# Altium PCB main.PcbDoc (part 2 of 2)
Units mm, origin at the board's own origin, x right, y up, seen from the top; angles counter-clockwise.
Board outline 98 x 96 mm, 4 copper layers (Top Layer, PWR Layer, GND Layer, Bottom Layer), stack 0.672 mm thick; 83 components, 70 nets, 395 pads, 159 vias.
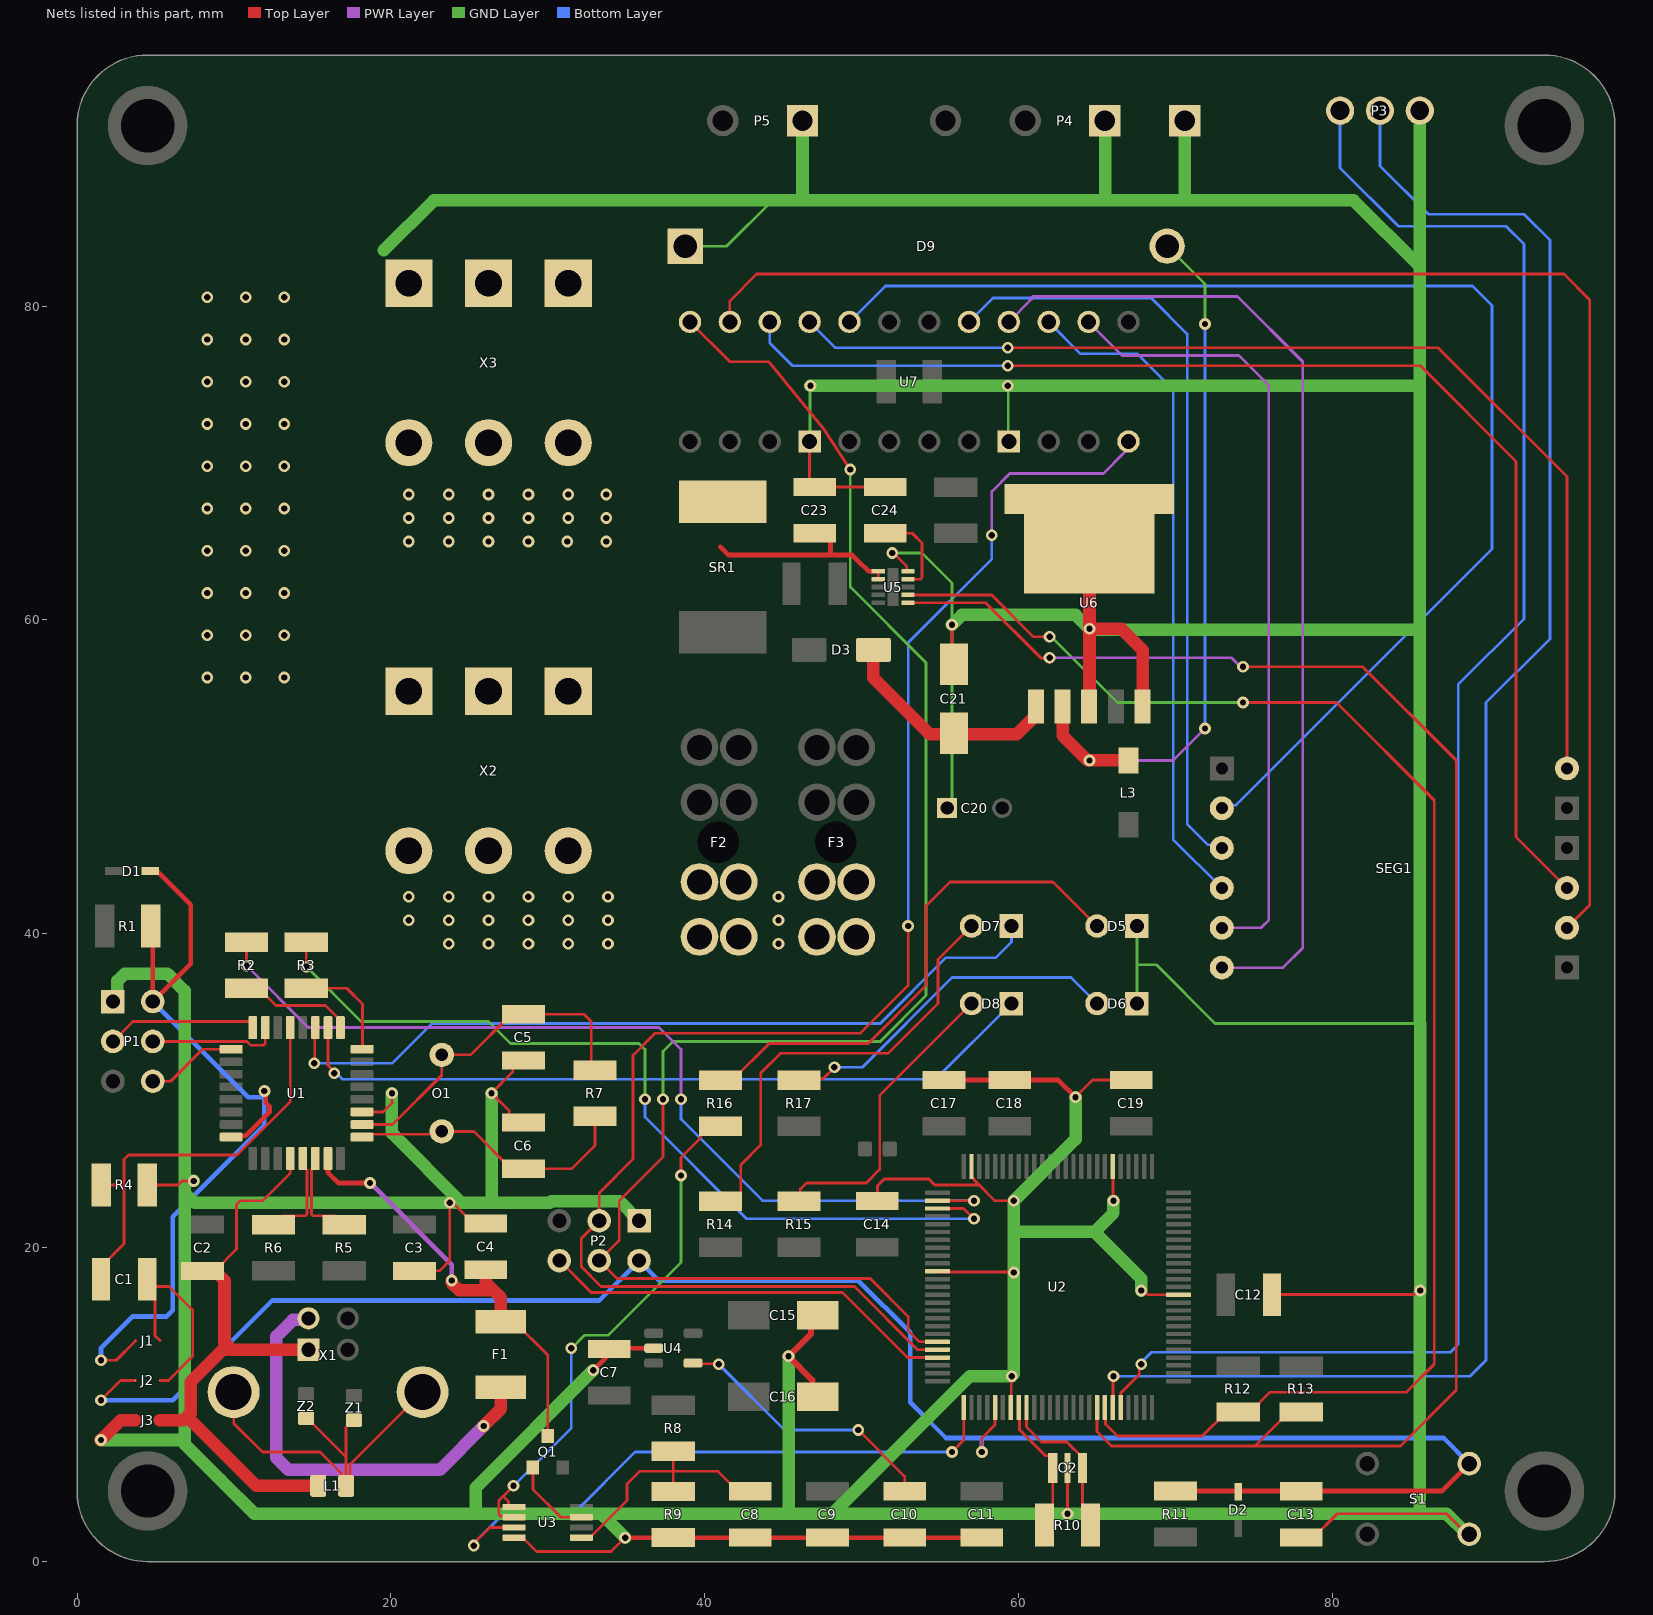
[diagram p4: the nets of this part, all layers, seen from the top]

## Via types
v1: diameter 0.75, hole 0.4, Top Layer to Bottom Layer, 159 vias

## Nets (pads, with @x,y where several pads share a name; then routed paths per layer and width w, separated by ;. In a path a pad name is that pad's centre, name@x,y a point inside that pad or via, vN(x,y) a via of type N, cw(c..) or ccw(c..) an arc to the next point about the centre after c; other vN are vias at no path point) (continued)
D_Seg_A: SEG1.11 U7.14 | length 98.1
  Top Layer w0.175: U7.14@41.6,78.994 41.6,80.335 43.307,82.042 94.742,82.042 96.393,80.391 96.393,41.832 SEG1.11@94.947,40.386
D_Seg_B: SEG1.7 U7.16 | length 70.9
  Top Layer w0.175: v1(59.309,77.343) 86.741,77.343 94.947,69.137 SEG1.7@94.947,50.546
  Bottom Layer w0.175: U7.16@46.68,78.994 48.331,77.343 v1(59.309,77.343)
D_Seg_C: SEG1.4 U7.20 | length 49.6
  Bottom Layer w0.175: U7.20@56.84,78.994 58.364,80.518 68.453,80.518 70.739,78.232 70.739,46.99 72.056,45.673 72.74,45.673 SEG1.4@72.947,45.466
D_Seg_D: SEG1.2 U7.23 | length 50.6
  PWR Layer w0.175: U7.23@64.46,78.994 66.599,76.855 74.046,76.855 75.946,74.954 75.946,40.894 75.438,40.386 SEG1.2@72.947,40.386
  Bottom Layer w0.175: SEG1.2@72.843,40.49 SEG1.2@72.947,40.386
D_Seg_DP: SEG1.3 U7.22 | length 42.8
  Bottom Layer w0.175: U7.22@61.92,78.994 63.952,76.962 67.564,76.962 69.85,74.676 69.85,46.023 SEG1.3@72.947,42.926
D_Seg_E: SEG1.1 U7.21 | length 64.2
  PWR Layer w0.175: U7.21@59.38,78.994 60.833,80.447 60.833,80.542 60.901,80.61 73.949,80.61 78.105,76.454 78.105,39.092 76.859,37.846 SEG1.1@72.947,37.846
D_Seg_F: SEG1.10 U7.15 | length 80.9
  Top Layer w0.175: U7.15@44.14,78.994 U7.15@44.365,78.769 ; v1(59.309,76.2) 85.598,76.2 91.694,70.104 91.694,46.179 SEG1.10@94.947,42.926
  Bottom Layer w0.175: U7.15@44.14,78.994 44.14,77.653 45.593,76.2 v1(59.309,76.2)
D_Seg_G: SEG1.5 U7.17 | length 82
  Bottom Layer w0.175: U7.17@49.22,78.994 51.506,81.28 88.924,81.28 90.17,80.034 90.17,64.516 73.853,48.199 73.14,48.199 SEG1.5@72.947,48.006
DX_N: R5.2 U1.30 | length 6.9
  Top Layer w0.102: U1.30@15.191,25.231 U1.30@15.191,25.681 ; R5.2@16.171,21.466 R5.2@17.02,21.466 R5.2@16.456,22.031
  Top Layer w0.175: U1.30@15.191,25.231 14.935,24.975 14.935,22.133 15.038,22.031 R5.2@16.456,22.031
DX_P: R6.2 U1.29 | length 7.7
  Top Layer w0.102: R6.2@13.084,22.031 R6.2@12.52,21.466 13.285,21.466 R6.2@13.849,22.031 ; U1.29@14.351,25.641 U1.29@14.391,25.681 ; U1.29@14.391,25.211 U1.29@14.391,25.641
  Top Layer w0.175: R6.2@13.084,22.031 13.849,22.031 14.556,22.031 14.659,22.133 14.659,24.874 14.659,24.944 U1.29@14.391,25.211
GND: C3.1 C4.2 C5.2 C6.2 C7.1 C8.1 C9.1 C10.1 C11.1 C12.1 C13.1 C14.1 C15.2 C16.2 C17.1 C18.1 C19.1 C20.2 C21.2 C23.1 C24.2 D5.2 D6.2 D9.2 J3.1 O2.2 P1.6 P2.6 P3.3 P4.3 P4.4 P5.2 R4.2 R9.1 S1.3 U1.3 U2.11 U2.32 U2.62 U2.81 U2.99 U3.4 U4.2 U5.10 U6.3 U6.5 U6.6 U7.4 U7.9 X2.2 X3.2 | length 698.6
  Top Layer w0.175: R4.2@4.466,24 6.445,24 6.702,24.257 v1(7.433,24.257) ; U1.3@18.161,28.651 19.507,28.651 20.066,29.21 v1(20.066,29.845) ; C3.1@21.5,18.525 23.097,18.525 23.749,19.177 v1(23.749,22.86) 23.859,22.75 24.046,22.75 25.255,21.541 C4.2@26.035,21.541 ; U3.4@27.85,1.525 28.385,1.525 29.275,0.635 34.036,0.635 v1(34.925,1.524) ; C6.2@28.448,27.975 28.038,27.975 27.546,28.468 27.546,28.715 v1(26.416,29.845) 27.757,31.186 27.757,31.433 28.249,31.926 C5.2@28.448,31.926 ; U7.9@46.68,71.374 46.68,68.796 C23.1@47,68.475 C24.2@51.5,68.475 ; C15.2@46.775,15.275 C15.2@47.2,15.7 ; C16.2@46.86,10.84 C16.2@47.2,10.5 ; C14.1@51,22.975 51,23.949 51.435,24.384 54.272,24.384 54.653,24.003 57.49,24.003 ; v1(51.943,64.262) 52.024,64.262 52.876,63.41 52.876,63.162 52.938,63.1 U5.10@52.95,63.1 ; U2.11@54.82,18.5 54.862,18.458 59.647,18.458 v1(59.69,18.415) ; v1(55.753,59.69) 55.753,57.318 C21.2@55.88,57.191 ; U2.99@57,25.18 57,24.52 57.171,24.349 57.171,24.322 57.49,24.003 ; C11.1@57.656,1.524 C11.1@57.658,1.525 ; U2.32@59.5,9.82 59.531,9.851 59.531,11.779 v1(59.563,11.811) ; v1(59.69,22.987) 58.506,22.987 57.49,24.003 ; v1(63.119,3.048) O2.2@63.119,5.969 ; v1(63.627,29.591) 64.721,30.685 C19.1@67.183,30.685 ; U6.3@64.5,54.5 U6.3@64.516,54.516 ; U6.6@64.5,65.175 U6.6@64.516,65.159 ; U2.81@66,25.18 66.02,25.16 66.02,23.261 v1@66.04,23.241 ; v1(67.818,17.272) 67.974,17.272 68.246,17 U2.62@70.18,17 ; C12.1@76.15,17 76.168,17.018 85.188,17.018 85.442,17.272 v1(85.598,17.272) ; C13.1@78,1.525 78.78,1.525 80.302,3.048 87.269,3.048 88.574,1.742 S1.3@88.721,1.742
  Top Layer w0.3: v1(32.893,12.192) 34.301,13.6 U4.2@36.745,13.6 ; v1(34.925,1.524) 47.819,1.524 C11.1@57.656,1.524 ; C17.1@55.245,30.685 C18.1@59.436,30.685 62.533,30.685 v1(63.627,29.591)
  Top Layer w0.4: C15.2@46.775,15.275 46.775,14.517 v1(45.339,13.081) 46.86,11.56 C16.2@46.86,10.84
  Top Layer w0.8: v1(1.524,7.747) 2.777,9 J3.1@3.72,9 ; U6.3@64.516,54.516 v1(64.516,59.436) ; U6.6@64.516,65.159 v1(64.516,59.436) ; U6.5@67.9,54.5 67.9,58.084 66.548,59.436 v1(64.516,59.436)
  GND Layer w0.175: D9.2@38.763,83.82 41.402,83.82 44.323,86.741 ; U7.9@46.68,71.374 46.708,71.402 46.708,74.902 v1(46.736,74.93) ; v1(51.943,64.262) 53.848,64.262 55.753,62.357 v1(55.753,59.69) C20.2@55.753,47.879 ; v1(59.309,74.93) 59.344,74.895 59.344,71.41 U7.4@59.38,71.374 ; v1@64.32,59.632 v1(64.516,59.436) ; D6.2@67.54,35.56 67.54,38.03 ; D5.2@67.54,40.5 67.54,38.03 ; 70.58,86.999 70.838,86.741 ; 85.566,34.29 72.517,34.29 68.777,38.03 67.54,38.03
  GND Layer w0.8: v1(1.524,7.747) 6.858,7.747 ; P1.6@2.286,35.687 2.574,35.975 2.574,36.996 3.042,37.465 5.754,37.465 6.858,36.361 6.858,24.257 ; v1(7.433,24.257) 6.858,24.257 ; 19.558,83.566 22.733,86.741 44.323,86.741 46.228,86.741 ; v1(20.066,29.845) 20.066,27.305 24.511,22.86 ; v1(26.416,29.845) 26.416,22.86 ; v1(32.893,12.192) 25.4,4.699 25.4,3.048 ; 33.591,2.857 v1(34.925,1.524) ; P2.6@35.814,21.717 34.562,22.969 30.216,22.969 30.107,22.86 26.416,22.86 ; v1(45.339,13.081) 45.339,3.048 ; P5.2@46.228,91.821 46.228,86.741 ; v1(46.736,74.93) v1(59.309,74.93) 85.471,74.93 85.566,74.835 ; v1(55.753,59.69) 56.388,60.325 63.627,60.325 v1@64.32,59.632 ; v1(63.627,29.591) 63.627,26.924 v1(59.69,22.987) 59.69,20.883 ; v1(64.516,59.436) 64.574,59.378 85.566,59.378 ; P4.3@65.532,91.789 65.532,86.741 ; v1(66.04,22.987) 66.04,22.225 64.825,21.01 ; v1(67.818,17.272) 67.818,18.017 64.825,21.01 ; 70.58,86.999 P4.4@70.58,91.821 ; P3.3@85.566,92.456 85.566,82.518 ; S1.3@88.721,1.742 88.574,1.742 87.269,3.048 85.566,3.048 ; 6.858,7.747 6.858,7.493 9.144,5.207 11.303,3.048 25.4,3.048 ; 6.858,7.747 6.858,23.495 ; 6.858,23.495 6.858,24.257 ; 6.858,23.495 7.493,22.86 v1(23.749,22.86) 24.511,22.86 ; 24.511,22.86 26.416,22.86 ; 25.4,3.048 45.339,3.048 ; 45.339,3.048 48.133,3.048 ; 46.228,86.741 65.532,86.741 ; 48.133,3.048 v1(63.119,3.048) 85.566,3.048 ; 48.133,3.048 56.896,11.811 v1(59.563,11.811) 59.69,11.938 v1(59.69,18.415) 59.69,20.883 ; 59.69,20.883 59.817,21.01 64.825,21.01 ; 65.532,86.741 70.838,86.741 81.343,86.741 85.566,82.518 ; 85.566,3.048 85.566,17.113 85.598,17.145 v1(85.598,17.272) 85.598,34.258 85.566,34.29 85.566,59.378 ; 85.566,59.378 85.566,74.835 ; 85.566,74.835 85.566,82.518
  other v1: 8.3,56.34 10.75,56.34 13.2,56.34 8.3,59.032 10.75,59.032 13.2,59.032 8.3,61.724 10.75,61.724 13.2,61.724 8.3,64.416 10.75,64.416 13.2,64.416 8.3,67.107 10.75,67.107 13.2,67.107 8.3,69.799 10.75,69.799 13.2,69.799 8.3,72.49 10.75,72.49 13.2,72.49 8.3,75.182 10.75,75.182 13.2,75.182 8.3,77.874 10.75,77.874 13.2,77.874 8.3,80.566 10.75,80.566 13.2,80.566
LM2576_OUTPUT: D9.1 L3.1 U6.2 | length 46.8
  Top Layer w0.8: U6.2@62.8,54.5 62.8,52.643 64.393,51.05 L3.1@67,51.05
  PWR Layer w0.175: v1@64.393,51.05 69.846,51.05 v1(71.882,53.086)
  GND Layer w0.175: D9.1@69.463,83.82 71.882,81.401 v1(71.882,78.867)
  Bottom Layer w0.175: v1(71.882,53.086) v1(71.882,78.867)
  other v1: 64.516,51.05
LM2576_VIN: C21.1 D3.C U6.1 | length 14.9
  Top Layer w0.175: U6.1@61.1,53.93 61.1,54.271 U6.1@61.1,54.5
  Top Layer w0.8: D3.C@50.75,58.1 50.75,56.311 54.356,52.705 56.059,52.705 59.875,52.705 U6.1@61.1,53.93 ; U6.1@60.99,54.381 U6.1@61.1,54.271
Load+: C23.2 SR1.2 U5.1 U5.2 X3.1 | length 15.1
  Top Layer w0.175: SR1.2@41.148,67.523 SR1.2@42.41,66.26 ; U5.2@51.05,62.6 U5.1@51.05,63.1
  Top Layer w0.3: 40.996,64.668 41.529,64.135 48.006,64.135 ; C23.2@47,65.525 47.576,65.525 48.006,65.095 48.006,64.135 ; U5.1@51.05,63.1 50.438,63.1 49.784,63.754 49.403,64.135 48.006,64.135
  other v1: 21.14,65 23.68,65 26.22,65 28.76,65 31.242,65 33.724,65 21.14,66.5 23.68,66.5 26.22,66.5 28.76,66.5 31.3,66.5 33.724,66.5 21.14,68 23.68,68 26.22,68 28.76,68 31.3,68 33.724,68
MISO1: P2.1 U2.22 | length 26.6
  Top Layer w0.175: P2.1@30.734,19.177 32.766,17.145 48.768,17.145 52.913,13 U2.22@54.82,13
MOSI1: P2.4 U2.21 U7.1 | length 103.1
  Top Layer w0.175: v1(52.959,40.5) 52.959,36.703 49.928,33.672 36.847,33.672 35.433,32.258 35.433,25.654 33.274,23.495 P2.4@33.274,21.717 32.131,20.574 32.131,18.796 33.401,17.526 49.53,17.526 53.556,13.5 U2.21@54.82,13.5
  PWR Layer w0.175: v1(58.293,65.405) 58.293,68.199 59.436,69.342 65.405,69.342 66.761,70.698 66.761,71.135 U7.1@67,71.374
  Bottom Layer w0.175: v1(52.959,40.5) 52.959,58.547 58.293,63.881 v1(58.293,65.405)
NetC1_2: C1.2 J1.1 J2.1 | length 13.6
  Top Layer w0.175: J2.1@5.28,11.54 5.825,11.54 7.366,13.081 7.366,16.026 5.866,17.526 4.95,17.526 C1.2@4.475,18 4.475,17.22 4.968,16.728 4.968,14.392 J1.1@5.28,14.08
NetC10_2: C10.2 U4.4 | length 17.4
  Top Layer w0.175: U4.4@39.255,12.65 39.293,12.612 40.855,12.612 v1(40.894,12.573) ; v1(49.784,8.382) 52.738,5.428 C10.2@52.738,4.475
  Bottom Layer w0.175: v1(40.894,12.573) 45.085,8.382 v1(49.784,8.382)
NetD5_1: D5.1 R16.1 | length 33.4
  Top Layer w0.175: R16.1@41,30.676 41.765,30.676 44.109,33.02 50.419,33.02 54.102,36.703 54.102,41.783 55.626,43.307 62.193,43.307 D5.1@65,40.5
NetD6_1: D6.1 R17.1 | length 22.4
  Top Layer w0.175: R17.1@46.01,30.676 46.121,30.786 47.55,30.786 v1(48.26,31.496)
  Bottom Layer w0.175: v1(48.26,31.496) 50.038,31.496 55.753,37.211 63.349,37.211 D6.1@65,35.56
NetD7_1: D7.1 R14.1 | length 28.6
  Top Layer w0.175: R14.1@41,22.966 41.765,22.966 42.292,23.493 42.292,25.274 43.561,26.543 43.561,31.115 44.831,32.385 51.689,32.385 54.864,35.56 54.864,38.364 D7.1@57,40.5
NetD8_1: D8.1 R15.1 | length 19.4
  Top Layer w0.175: R15.1@46.01,22.966 46.093,23.048 46.093,23.741 46.482,24.13 50.292,24.13 51.146,24.984 51.146,29.706 D8.1@57,35.56
NetF1_1: F1.1 X1.1 | length 28.1
  Top Layer w0.8: v1(25.908,8.636) 27,9.728 F1.1@27,11.097
  PWR Layer w0.8: X1.1@14.982,15.621 14.765,15.404 13.753,15.404 12.7,14.351 12.7,6.604 13.462,5.842 23.114,5.842 v1(25.908,8.636)
NetF2_2: F2.2 F3.2 X2.1
  other v1: 23.68,39.37 26.22,39.37 28.76,39.37 31.3,39.37 33.84,39.37 44.7,39.37 21.14,40.87 23.68,40.87 26.22,40.87 28.76,40.87 31.3,40.87 33.84,40.87 44.7,40.87 21.14,42.37 23.68,42.37 26.22,42.37 28.76,42.37 31.3,42.37 33.84,42.37 44.7,42.37
NetL1_1: L1.1 X1.S1 X1.S2 Z1.1 Z2.1 | length 26.5
  Top Layer w0.175: X1.S2@9.98,10.3 9.98,8.816 11.811,6.985 15.494,6.985 16.822,5.657 16.822,5.434 16.922,5.334 L1.1@17.145,5.334 ; Z2.1@14.605,9.126 14.68,9.126 17.145,6.661 ; Z1.1@17.653,9.017 17.59,9.017 17.145,8.572 17.145,6.661 ; X1.S1@22.02,10.8 17.404,6.184 17.404,5.434 17.387,5.416 17.151,5.416 17.395,5.076 L1.1@17.145,4.826 L1.1@17.145,5.334 ; L1.1@17.145,5.334 17.145,5.425 17.145,6.661
"Op A (+) Input": U2.26 U3.3 | length 39.3
  Top Layer w0.175: v1(25.273,1.016) 25.273,1.143 26.305,2.175 U3.3@27.85,2.175 ; v1(55.753,6.985) 56.5,7.732 U2.26@56.5,9.82
  Bottom Layer w0.175: v1(25.273,1.016) 25.273,1.143 27.241,3.111 31.686,3.111 35.56,6.985 v1(55.753,6.985)
"Op A Output": R16.2 U3.1 U3.2 | length 34.1
  Top Layer w0.175: 26.879,3.875 26.879,2.986 26.982,2.884 27.791,2.884 U3.2@27.85,2.825 ; 26.879,3.892 27.156,4.169 27.49,3.835 27.49,3.587 27.603,3.475 U3.1@27.85,3.475 ; 27.168,4.181 v1(27.813,4.826) ; v1(38.481,24.602) 38.481,25.749 39.73,26.998 39.73,27.216 40.257,27.744 R16.2@41,27.744
  GND Layer w0.175: v1(31.496,13.589) 32.322,14.414 33.846,14.414 38.481,19.05 v1(38.481,24.602)
  Bottom Layer w0.175: v1(27.813,4.826) 31.496,8.509 v1(31.496,13.589)
"Op B (+) Input": C8.2 R8.1 R9.2 U3.5 | length 16.2
  Top Layer w0.175: U3.5@32.15,1.525 32.685,1.525 35.052,3.892 35.052,4.953 35.849,5.75 38,5.75 ; R9.2@38,4.466 38,5.75 ; R8.1@38,7.034 38,5.75 ; C8.2@42.899,4.475 42.119,4.475 40.845,5.75 38,5.75
"Op B Output": Q1.1 U3.7 | length 5.2
  Top Layer w0.175: Q1.1@29.05,6 29.05,4.605 30.83,2.825 U3.7@32.15,2.825
PB1_16U2: P1.3 U1.15 | length 8.3
  Top Layer w0.175: P1.3@4.826,33.147 10.828,33.147 11.066,32.908 11.888,32.908 11.991,33.011 U1.15@11.991,34.021
PB2_16U2: P1.4 U1.16 | length 9.7
  Top Layer w0.175: P1.4@2.286,33.147 3.556,34.417 11.004,34.417 11.191,34.229 U1.16@11.191,34.021
PB3_16U2: P1.1 U1.17 | length 5.8
  Top Layer w0.175: P1.1@4.826,30.607 5.969,30.607 8.013,32.651 U1.17@9.821,32.651
PD2_16U2: R3.2 U1.8 | length 6.9
  Top Layer w0.102: U1.8@18.161,32.651 U1.8@18.192,32.682
  Top Layer w0.175: R3.2@14.6,36.534 17.187,36.534 18.192,35.529 U1.8@18.192,32.682
PD3_16U2: R2.2 U1.9 | length 7.3
  Top Layer w0.102: R2.2@10.8,36.534 R2.2@11.565,36.534 ; U1.9@16.791,34.021 U1.9@16.791,34.481
  Top Layer w0.175: R2.2@11.565,36.534 12.666,35.433 15.839,35.433 U1.9@16.791,34.481
PD4_16U2: D8.2 U1.10 | length 48.4
  Top Layer w0.175: U1.10@15.991,34.021 15.991,31.625 16.383,31.233 v1(16.383,31.115)
  Bottom Layer w0.175: v1(16.383,31.115) 16.523,31.115 16.904,30.734 54.714,30.734 D8.2@59.54,35.56
PD5_16U2: D7.2 U1.11 | length 51
  Top Layer w0.175: v1(15.113,31.75) 15.152,31.789 15.152,33.982 U1.11@15.191,34.021
  Bottom Layer w0.175: v1(15.113,31.75) 20.066,31.75 22.606,34.29 51.181,34.29 55.372,38.481 58.547,38.481 59.54,39.474 D7.2@59.54,40.5
PD7_16U2: C1.1 R4.1 U1.13 | length 26.6
  Top Layer w0.175: C1.1@1.525,18 1.525,18.78 3,20.255 3,24.257 ; R4.1@1.534,24 2.743,24 3,24.257 ; U1.13@13.591,34.021 13.591,29.318 10.181,25.908 3.277,25.908 3,25.631 3,24.257
Reset: C13.2 D2.A J2.2 P2.5 R11.1 S1.1 U2.30 | length 125.1
  Top Layer w0.175: v1(1.524,10.287) 2.777,11.54 J2.2@3.72,11.54 ; v1(57.658,6.985) 57.658,7.874 58.5,8.716 U2.30@58.5,9.82
  Top Layer w0.3: R11.1@70,4.492 86.971,4.492 S1.1@88.721,6.242
  Bottom Layer w0.3: v1(1.524,10.287) 6.096,10.287 12.446,16.637 33.274,16.637 P2.5@35.814,19.177 37.084,17.907 49.784,17.907 53.086,14.605 53.086,10.16 55.372,7.874 57.658,7.874 ; v1(57.658,6.985) 57.658,7.874 ; S1.1@88.721,6.242 87.089,7.874 57.658,7.874
Reset2: D1.A J1.2 P1.5 R1.1 U1.24 | length 54.7
  Top Layer w0.175: v1(1.524,12.827) 2.497,12.827 3.72,14.05 J1.2@3.72,14.08 ; R1.1@4.699,40.5 R1.1@4.826,40.373
  Top Layer w0.3: R1.1@4.826,40.373 P1.5@4.826,35.687 7.239,38.1 7.239,41.861 D1.A@5.1,44 ; U1.24@9.821,27.051 9.901,27.131 10.748,27.131 12.262,28.645 12.262,29.01 12.024,29.248 12.024,29.899 v1(11.938,29.985)
  Bottom Layer w0.3: v1(1.524,12.827) 1.524,13.589 3.556,15.621 5.715,15.621 6.096,16.002 6.096,21.971 11.938,27.813 11.938,29.591 ; P1.5@4.826,35.687 10.922,29.591 11.938,29.591 ; v1(11.938,29.985) 11.938,29.591
RXD0: R2.1 U2.2 | length 59
  Top Layer w0.175: v1(10.8,37.973) R2.1@10.8,39.466 ; U2.2@54.82,23 54.826,22.993 57.144,22.993 v1(57.15,22.987)
  PWR Layer w0.175: v1@10.795,37.973 14.732,34.036 37.084,34.036 38.481,32.639 v1(38.481,29.464)
  Bottom Layer w0.175: v1(38.481,29.464) 38.481,28.194 43.675,23 53.902,23 53.915,22.987 v1(57.15,22.987)
RXD1: P3.2 U2.45 | length 115.5
  Top Layer w0.175: U2.45@66,9.82 66.02,9.84 66.02,11.791 v1(66.04,11.811)
  Bottom Layer w0.175: v1(66.04,11.811) 88.773,11.811 89.789,12.827 89.789,54.737 93.853,58.801 93.853,84.201 92.202,85.852 86.106,85.852 83.026,88.932 P3.2@83.026,92.456
SCK1: P2.3 U2.20 U7.13 | length 107.7
  Top Layer w0.175: v1@37.338,29.337 37.338,25.781 34.544,22.987 34.544,20.447 P2.3@33.274,19.177 34.417,18.034 50.546,18.034 52.959,15.621 52.959,14.732 53.691,14 U2.20@54.82,14 ; U7.13@39.06,78.994 41.6,76.454 44.069,76.454 44.172,76.351 47.582,72.165 v1(49.276,69.596)
  GND Layer w0.175: v1@37.338,29.337 37.338,32.512 37.973,33.147 51.181,33.147 54.102,36.068 54.102,57.277 49.276,62.103 v1(49.276,69.596)
  other v1: 37.338,29.464
SCL: R13.1 U2.43 U5.6 | length 109.4
  Top Layer w0.175: U5.6@52.95,61.1 57.899,61.1 61.44,57.559 v1@61.914,57.559 ; v1@61.866,57.387 v1@61.976,57.277 ; U2.43@65,9.82 65,8.279 65.913,7.366 75.067,7.366 ; v1(74.295,57.023) 81.921,57.023 87.884,51.06 87.884,10.922 84.328,7.366 75.067,7.366 ; R13.1@78,9.534 77.235,9.534 75.067,7.366
  PWR Layer w0.175: v1(61.976,57.594) 73.568,57.594 74.139,57.023 v1(74.295,57.023)
SDA: R12.1 U2.44 U5.7 | length 99.1
  Top Layer w0.175: U5.7@52.95,61.6 58.288,61.6 60.96,58.928 v1(61.976,58.928) ; U2.44@65.5,9.82 65.538,9.782 65.538,8.757 66.294,8.001 71.702,8.001 73.235,9.534 R12.1@74,9.534 74.765,9.534 76.026,10.795 84.709,10.795 86.487,12.573 86.487,48.514 80.264,54.737 v1(74.295,54.737)
  GND Layer w0.175: v1@62.039,58.991 66.294,54.737 v1(74.295,54.737)
TXD0: R3.1 U2.3 | length 55.9
  Top Layer w0.175: v1(14.6,37.91) R3.1@14.6,39.466 ; U2.3@54.82,22.5 56.494,22.5 v1(57.15,21.844)
  GND Layer w0.175: v1@14.605,37.91 18.098,34.417 26.226,34.417 27.622,33.02 35.814,33.02 36.195,32.639 v1(36.195,29.464)
  Bottom Layer w0.175: v1(36.195,29.464) 36.195,28.321 42.672,21.844 v1(57.15,21.844)
TXD1: P3.1 U2.46 | length 113.2
  Top Layer w0.175: U2.46@66.5,9.82 66.507,9.827 66.507,10.754 67.691,11.938 67.691,12.183 67.708,12.2 67.708,12.556 v1@67.691,12.573
  Bottom Layer w0.175: v1@67.754,12.636 68.453,13.335 87.503,13.335 88.011,13.843 88.011,55.88 92.202,60.071 92.202,83.947 91.059,85.09 84.201,85.09 80.486,88.805 P3.1@80.486,92.456
  other v1: 67.818,12.573
USBGND: C2.1 J3.2 L1.2 U1.28 X1.4 | length 38.9
  Top Layer w0.175: C2.1@8.78,18.525 10.16,19.906 10.16,22.757 10.39,22.987 11.811,22.987 13.591,24.767 U1.28@13.591,25.681
  Top Layer w0.8: J3.2@5.28,9 6.77,9 7.239,9.469 7.239,11.43 9.309,13.5 9.866,13.5 ; 7.013,9.243 11.43,4.826 L1.2@15.367,4.826 ; C2.1@8,18.525 8.78,18.525 9.397,17.908 9.397,13.969 9.587,13.778 9.866,13.5 ; X1.4@14.75,13.5 9.866,13.5
USBVCC: C4.1 F1.2 Q1.3 U1.31 | length 27.9
  Top Layer w0.175: F1.2@27,15.297 27.85,15.297 30,13.147 Q1.3@30,8
  Top Layer w0.3: U1.31@15.991,25.681 15.991,24.776 16.637,24.13 v1(18.669,24.13)
  Top Layer w0.8: v1(23.876,17.907) 23.876,17.766 24.345,17.298 26.517,17.298 ; C4.1@26.035,18.591 26.035,17.78 26.517,17.298 ; F1.2@27,15.297 27,16.815 26.517,17.298
  PWR Layer w0.3: v1(18.669,24.13) 23.876,18.923 v1(23.876,17.907)
VREG: C24.1 U5.9 | length 5.7
  Top Layer w0.175: C24.1@51.5,65.525 53.22,65.525 53.848,64.897 53.848,62.702 53.745,62.6 U5.9@52.95,62.6
XTAL1: O2.3 R10.2 U2.34 | length 10.1
  Top Layer w0.175: U2.34@60.5,9.82 60.5,8.588 61.468,7.62 63.068,7.62 64.069,6.619 O2.3@64.069,5.969 64.069,2.841 R10.2@64.585,2.325
XTAL1_16U2: C6.1 O1.1 R7.1 U1.1 | length 18.5
  Top Layer w0.175: U1.1@18.161,27.051 18.341,27.231 23.061,27.231 O1.1@23.241,27.411 25.282,27.411 27.668,25.025 C6.1@28.448,25.025 31.502,25.025 33,26.523 R7.1@33,28.385
XTAL2: O2.1 R10.1 U2.33 | length 8.8
  Top Layer w0.175: U2.33@60,9.82 60.052,9.768 60.052,8.401 61.709,6.744 61.957,6.744 62.169,6.531 62.169,2.841 R10.1@61.653,2.325
XTAL2_16U2: C5.1 O1.2 R7.2 U1.2 | length 21.7
  Top Layer w0.175: U1.2@18.161,27.851 20.104,27.851 23.241,30.988 O1.2@23.241,32.291 25.084,32.291 27.668,34.876 C5.1@28.448,34.876 32.307,34.876 32.766,34.417 32.766,31.551 R7.2@33,31.317
pads on no net: F2. F3. S1.2 S1.4 U1.5 U1.6 U1.7 U1.12 U1.14 U1.18 U1.19 U1.20 U1.21 U1.22 U1.23 U1.25 U1.26 U2.1 U2.4 U2.5 U2.6 U2.8 U2.9 U2.12 U2.13 U2.14 U2.15 U2.16 U2.17 U2.18 U2.19 U2.23 U2.24 U2.25 U2.27 U2.28 U2.29 U2.35 U2.36 U2.37 U2.38 U2.39 U2.40 U2.41 U2.42 U2.47 U2.48 U2.49 U2.50 U2.51 U2.52 U2.53 U2.54 U2.55 U2.56 U2.57 U2.58 U2.59 U2.60 U2.63 U2.64 U2.65 U2.66 U2.67 U2.68 U2.69 U2.70 U2.71 U2.72 U2.73 U2.74 U2.75 U2.76 U2.77 U2.79 U2.82 U2.83 U2.84 U2.85 U2.86 U2.87 U2.88 U2.89 U2.90 U2.91 U2.92 U2.93 U2.94 U2.95 U2.96 U2.97 U5.11 U7.3 U7.5 U7.8 U7.10 U7.24

## Polygon pours and split planes (outlines as drawn)
GND on Bottom Layer "NONET_L01_P-001" (hatched 45Degree grid 0.508 track 0.203, pour order 1): 4.5,96 93.5,96 cw(c93.5,91.5) 98,91.5 98,4.5 cw(c93.5,4.5) 93.5,0 4.5,0 cw(c4.5,4.5) 0,4.5 0,91.5 cw(c4.5,91.5)
GND on Top Layer "NONET_L01_P-001" (hatched 45Degree grid 0.508 track 0.203, pour order 0): 4.5,96 93.5,96 cw(c93.5,91.5) 98,91.5 98,4.5 cw(c93.5,4.5) 93.5,0 4.5,0 cw(c4.5,4.5) 0,4.5 0,91.5 cw(c4.5,91.5)

## Keep-outs
Keep-Out Layer:
  the board outline again, w0.254

## Other copper
Top Layer:
  region net Battery+: 37.648,60 37.648,47.498 51.562,47.498 51.562,53.34 44.648,53.34 44.648,60
  region net NetF2_2: 18.14,48.3 34.3,48.3 34.3,44.45 34.554,44.196 51.562,44.196 51.562,36.807 23.633,36.807 18.14,42.3
  pour cut-out: 53.356,8.398 53.356,26.654 71.739,26.654 71.739,8.398
  pour cut-out: 8.398,35.417 19.542,35.417 19.542,24.273 8.398,24.273
  region net GND: 7.752,84.46 32.38,84.46 34.3,82.54 34.3,77.988 32.812,76.5 17.318,76.5 16,75.182 16,61.724 17.224,60.5 33,60.5 34.3,59.2 34.3,53.858 32.902,52.46 7.484,52.46 5.5,54.444 5.5,82.208
  region net Load+: 18.14,74.3 35.941,74.3 35.941,69.523 44.069,69.523 44.069,62.865 21.463,62.865 18.14,66.188
PWR Layer:
  region net Battery+: 37.648,60 44.648,60 44.648,53.34 51.562,53.34 51.562,47.498 37.648,47.498
  region net GND: 34.3,82.54 34.3,77.988 32.812,76.5 17.318,76.5 16,75.182 16,61.724 17.224,60.5 33,60.5 34.3,59.2 34.3,53.858 32.902,52.46 7.484,52.46 5.5,54.444 5.5,82.208 7.752,84.46 32.38,84.46
  region net NetF2_2: 18.14,48.3 34.3,48.3 34.3,44.45 34.554,44.196 51.562,44.196 51.562,36.807 23.633,36.807 18.14,42.3
  region net Load+: 18.14,74.3 35.941,74.3 35.941,69.523 44.069,69.523 44.069,62.865 21.463,62.865 18.14,66.188
GND Layer:
  region net Battery+: 37.648,60 44.648,60 44.648,53.34 51.562,53.34 51.562,47.498 37.648,47.498
  region net GND: 7.752,84.46 32.38,84.46 34.3,82.54 34.3,77.988 32.812,76.5 17.318,76.5 16,75.182 16,61.724 17.224,60.5 33,60.5 34.3,59.2 34.3,53.858 32.902,52.46 7.484,52.46 5.5,54.444 5.5,82.208
  region net NetF2_2: 18.14,48.3 34.3,48.3 34.3,44.45 34.554,44.196 51.562,44.196 51.562,36.807 23.633,36.807 18.14,42.3
  region net Load+: 18.14,74.3 35.941,74.3 35.941,69.523 44.069,69.523 44.069,62.865 21.463,62.865 18.14,66.188
Bottom Layer:
  region net Battery+: 37.648,60 44.648,60 44.648,53.34 51.562,53.34 51.562,47.498 37.648,47.498
  region net GND: 32.38,84.46 34.3,82.54 34.3,77.988 32.812,76.5 17.318,76.5 16,75.182 16,61.724 17.224,60.5 33,60.5 34.3,59.2 34.3,53.858 32.902,52.46 7.484,52.46 5.5,54.444 5.5,82.208 7.752,84.46
  region net NetF2_2: 18.14,48.3 34.3,48.3 34.3,44.45 34.554,44.196 51.562,44.196 51.562,36.807 23.633,36.807 18.14,42.3
  region net Load+: 18.14,74.3 35.941,74.3 35.941,69.523 44.069,69.523 44.069,62.865 21.463,62.865 18.14,66.188
Multi-Layer:
  pour cut-out: 4.5,54.444 4.5,82.208 7.752,85.46 32.38,85.46 35.3,82.54 35.3,77.988 37.3,77.988 37.3,69.85 45,69.85 45,54 51.816,54 51.816,35.807 23.633,35.807 17.14,42.3 17.14,51.46 7.484,51.46
  pour cut-out: 1.016,36.957 1.016,29.337 6.096,29.337 6.096,36.957
  pour cut-out: 77.978,94.869 88.011,94.869 88.011,88.9 77.978,88.9
  pour cut-out: 37.084,22.987 37.084,17.907 29.464,17.907 29.464,22.987

## Silkscreen, mask and mechanical layers (free items; w line width, h text height)
Top Overlay:
  lines w0.254: 30.353,60.198 37.948,60.198 ; 44.348,60.198 46.863,60.198 ; 46.863,60.198 47,60.335 ; 46.863,60.198 47,60.335 ; 47,60.335 47,60.95 47,60.335
  text "TX" at 79.986,90.75 h1 r270
  text "RX" at 82.526,90.75 h1 r270
  text "GND" at 85.092,90.75 h1 r270
  text "UART" at 88.395,90.7 h1.2 r270
  text "+3V3" at 40.648,89.75 h1 r270
  text "GND" at 45.728,89.75 h1 r270
  text "+5V" at 54.84,89.75 h1 r270
  text "+5V" at 59.92,89.75 h1 r270
  text "GND" at 65,89.75 h1 r270
  text "GND" at 70.08,89.75 h1 r270
  text "-" at 16.334,80.46 h2
  text "LOAD" at 5.5,75.38 h2
  text "+" at 16.334,70.3 h2
  text "-" at 16.334,54.46 h2
  text "BATTERY" at 5.5,49.38 h2
  text "+" at 16.334,44.3 h2
  text "PNAR" at 59.608,16.522 h1.5
Bottom Overlay:
  drawing of 20 lines, arcs and shapes, not listed
  text "GND" at 49.184,92.073 h1.2 r270
  text "+5V" at 50.6,87.501 h1.2 r270
  text "GND" at 74.33,87.501 h1.2 r270
  text "+3V3" at 36.4,86.901 h1.2 r270
  text "TX" at 80.012,86.604 h1 r270
  text "RX" at 82.552,86.604 h1 r270
  text "+5V" at 62.25,85.8 h1
  text "GND" at 66.416,85.8 h1
  text "GND" at 85.066,85.584 h1 r270
  text "UART" at 88.421,83.821 h1.2 r270
  text "76A" at 54.441,58.749 h2.5 r270
  text "Max / Board / Rating" at 46.681,57.602 h1.5 r270
  text "Current" at 65.5,48.503 h3 r270
  text "RX" at 54.137,39.5 h1.2 r270
  text "On" at 62.138,39.5 h1.2 r270
  text "/" at 13.181,35.287 h1.2
  text "S" at 62.138,35.16 h1.2 r270
  text "GND" at 11.481,35.087 h1.2
  text "Reset" at 19.279,35.087 h1.2
  text "TX" at 54.137,34.56 h1.2 r270
  text "/" at 13.181,32.747 h1.2
  text "MOSI" at 11.481,32.547 h1.2
  text "SCK" at 17.28,32.547 h1.2
  text "/" at 13.181,30.207 h1.2
  text "+5V" at 11.481,30.007 h1.2
  text "MISO" at 18.28,30.007 h1.2
  text "+5V" at 30.134,23.8 h1.2 r270
  text "MOSI" at 32.674,23.8 h1.2 r270
  text "GND" at 35.214,23.8 h1.2 r270
  text "16U2 ICSP" at 2.956,18.502 h1.2 r270
  text "2560 ICSP" at 37.8,15.349 h1.2 r270
  text "Monitor" at 42.1,14.899 h1.8 r270
  text "Battery" at 44.9,14.75 h1.8 r270
  text "SCK" at 32.674,14.001 h1.2 r270
  text "MISO" at 30.134,13.001 h1.2 r270
  text "Voltage" at 66,12.503 h3 r270
  text "Reset" at 35.214,12.002 h1.2 r270
  text "V0" at 55.575,4.485 h1.6 r270
  text "RADM" at 51.575,3.661 h1.4 r270
  text "Reset" at 79.5,1.393 h1.2 r270
Top Paste:
  region: 37.648,60 44.648,60 44.648,53.34 51.562,53.34 51.562,47.498 37.648,47.498
  region: 7.752,84.46 32.38,84.46 34.3,82.54 34.3,77.988 32.812,76.5 17.318,76.5 16,75.182 16,61.724 17.224,60.5 33,60.5 34.3,59.2 34.3,53.858 32.902,52.46 7.484,52.46 5.5,54.444 5.5,82.208
  region: 18.14,48.3 34.3,48.3 34.3,44.45 34.554,44.196 51.562,44.196 51.562,36.807 23.633,36.807 18.14,42.3
  region: 18.14,74.3 35.941,74.3 35.941,69.523 44.069,69.523 44.069,62.865 21.463,62.865 18.14,66.188
Bottom Paste:
  region: 51.562,47.498 37.648,47.498 37.648,60 44.648,60 44.648,53.34 51.562,53.34
  region: 7.752,84.46 32.38,84.46 34.3,82.54 34.3,77.988 32.812,76.5 17.318,76.5 16,75.182 16,61.724 17.224,60.5 33,60.5 34.3,59.2 34.3,53.858 32.902,52.46 7.484,52.46 5.5,54.444 5.5,82.208
  region: 18.14,48.3 34.3,48.3 34.3,44.45 34.554,44.196 51.562,44.196 51.562,36.807 23.633,36.807 18.14,42.3
  region: 18.14,74.3 35.941,74.3 35.941,69.523 44.069,69.523 44.069,62.865 21.463,62.865 18.14,66.188
Top Solder:
  region: 37.648,60 44.648,60 44.648,53.34 51.562,53.34 51.562,47.498 37.648,47.498
  region: 7.752,84.46 32.38,84.46 34.3,82.54 34.3,77.988 32.812,76.5 17.318,76.5 16,75.182 16,61.724 17.224,60.5 33,60.5 34.3,59.2 34.3,53.858 32.902,52.46 7.484,52.46 5.5,54.444 5.5,82.208
  region: 18.14,74.3 35.941,74.3 35.941,69.523 44.069,69.523 44.069,62.865 21.463,62.865 18.14,66.188
  region: 18.14,48.3 34.3,48.3 34.3,44.45 34.554,44.196 51.562,44.196 51.562,36.807 23.633,36.807 18.14,42.3
Bottom Solder:
  region: 51.562,53.34 51.562,47.498 37.648,47.498 37.648,60 44.648,60 44.648,53.34
  region: 7.752,84.46 32.38,84.46 34.3,82.54 34.3,77.988 32.812,76.5 17.318,76.5 16,75.182 16,61.724 17.224,60.5 33,60.5 34.3,59.2 34.3,53.858 32.902,52.46 7.484,52.46 5.5,54.444 5.5,82.208
  region: 18.14,48.3 34.3,48.3 34.3,44.45 34.554,44.196 45.164,44.196 45.164,36.807 23.633,36.807 18.14,42.3
  region: 18.14,74.3 35.941,74.3 35.941,69.523 44.069,69.523 44.069,62.865 21.463,62.865 18.14,66.188

## Text inside footprints (layer, text, board x,y; h text height)
C15: Top Overlay "+" at 41.833,16.855 h1.5
C16: Top Overlay "+" at 41.833,11.655 h1.5
C20: Bottom Overlay "+" at 59.383,49.128 h1.3
C21: Top Overlay "+" at 54.725,51.824 h1.5 r90
P4: Bottom Overlay "[Front]" at 53.458,94.863 h0.75 r180; Bottom Overlay "4-Pin Screw Term" at 53.458,88.64 h0.75 r180
P5: Bottom Overlay "2-Pin Screw / Term" at 39.243,90.563 h0.75 r180; Bottom Overlay "[Front]" at 39.266,94.863 h0.75 r180
SEG1: Bottom Overlay "(Common Cathode)" at 80.347,35.199 h1.2 r270; Bottom Overlay "D4" at 74.371,50.263 h1.2 r225; Bottom Overlay "G" at 74.371,48.147 h1.2 r225; Bottom Overlay "C" at 74.371,45.607 h1.2 r225; Bottom Overlay "DP" at 74.371,42.643 h1.2 r225; Bottom Overlay "D" at 74.371,40.527 h1.2 r225; Bottom Overlay "E" at 74.371,37.987 h1.2 r225; Bottom Overlay "4-Digit 7seg Display" at 83.447,30.076 h1.5 r270; Bottom Overlay "B" at 92.109,50.687 h1.2 r225; Bottom Overlay "D3" at 91.261,47.723 h1.2 r225; Bottom Overlay "D2" at 91.261,45.183 h1.2 r225; Bottom Overlay "F" at 92.109,43.067 h1.2 r225; Bottom Overlay "A" at 92.109,40.527 h1.2 r225; Bottom Overlay "D1" at 91.543,37.705 h1.2 r225
X1: Bottom Overlay "Port" at 18.799,0.95 h1.2